# Altium PCB PCB1.PcbDoc
Units mm, origin at the board's own origin, x right, y up, seen from the top; angles counter-clockwise.
Board outline 100 x 100 mm, 2 copper layers (Top Layer, Bottom Layer); 113 components, 82 nets, 333 pads, 18 vias.
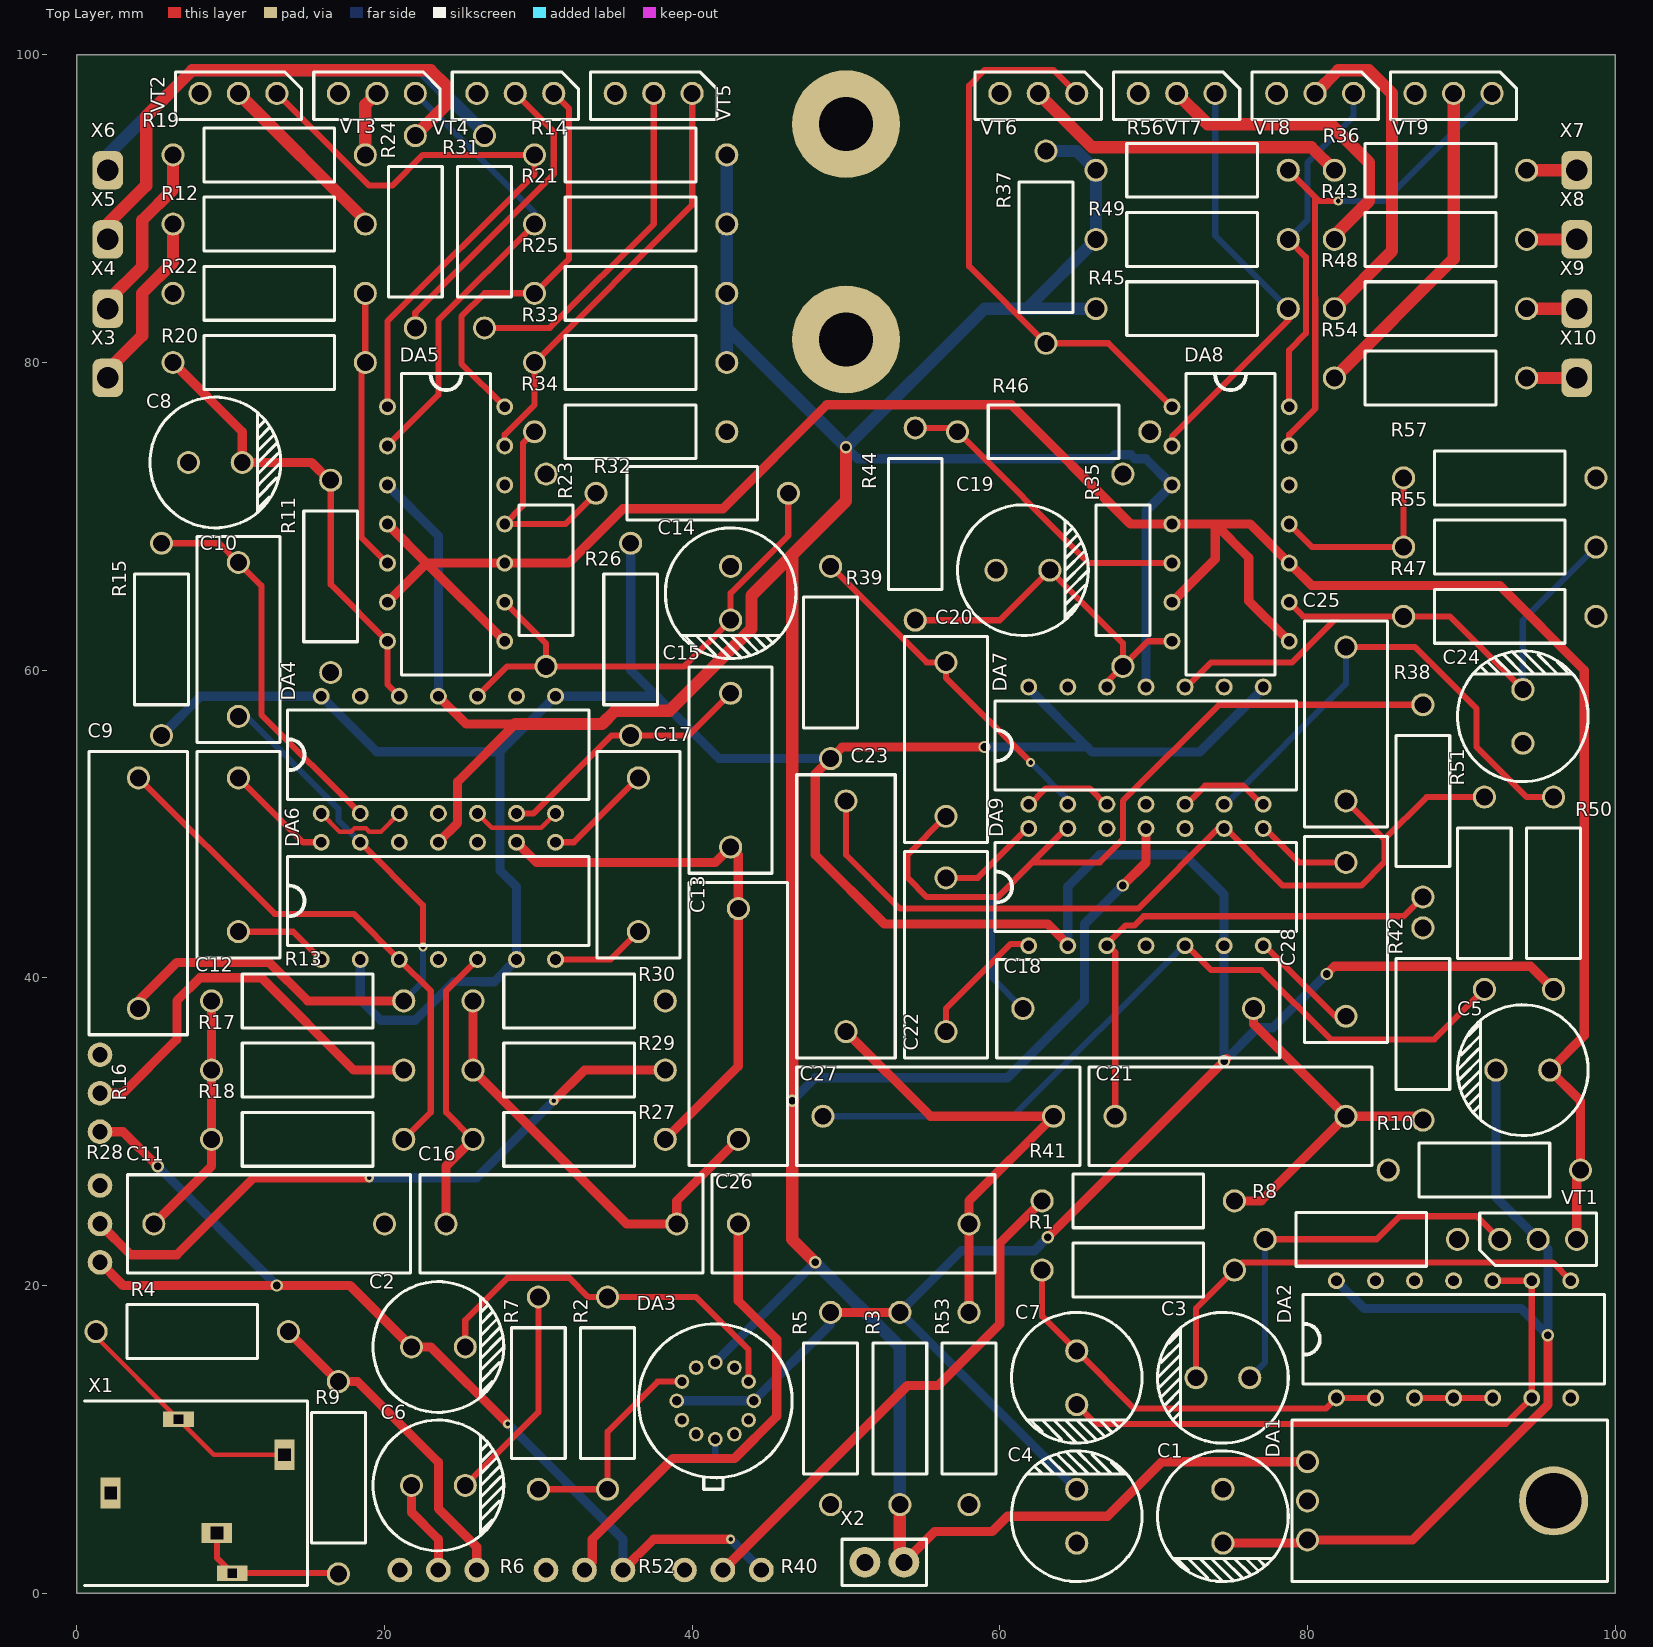
[diagram p0: Top Layer view]
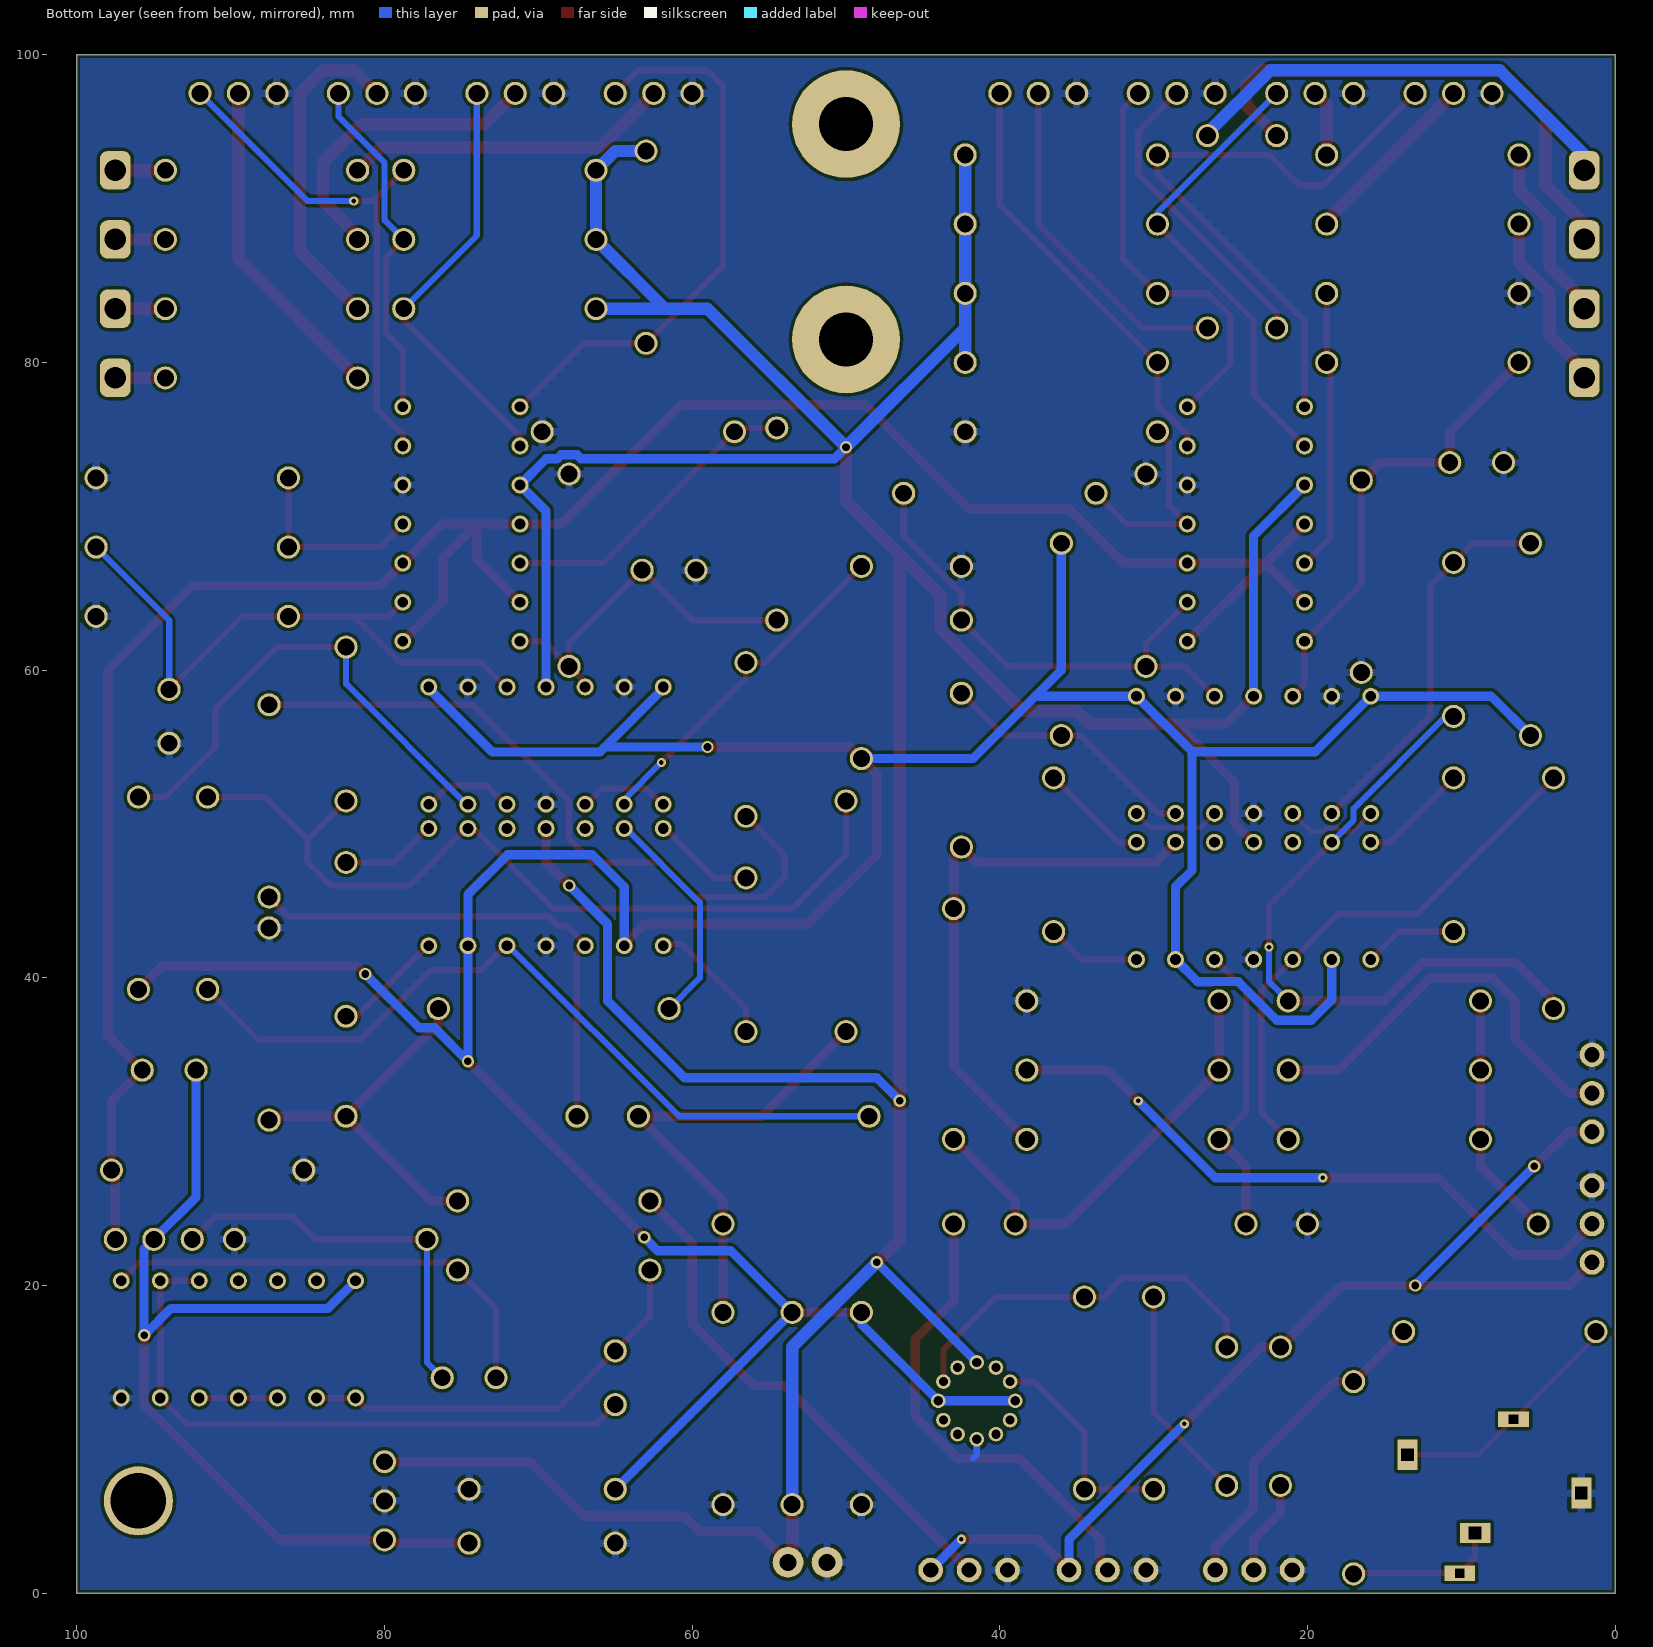
[diagram p1: Bottom Layer view, seen from below]

## Layer stack, top to bottom
Top Solder: solder mask 0.0102, Solder Resist, Dk 3.5
Top Layer: signal copper 0.0356
Dielectric 1: dielectric 0.32, FR-4, Dk 4.8
Bottom Layer: signal copper 0.0356
Bottom Solder: solder mask 0.0102, Solder Resist, Dk 3.5

## Board outline
0,0 100,0 100,100 0,100

## Design rules (kind name [scope] priority, off if disabled: settings)
BoardOutlineClearance [All] p1: gap=0.2 ignorepadtopadclearanceinfootprint=FALSE except(0.4: Arc-SplitBarrior Arc-SplitContinuation Track-SplitBarrior Track-SplitContinuation SMDPad-SplitBarrior SMDPad-SplitContinuation THPad-SplitBarrior THPad-SplitContinuation Via-SplitBarrior Via-SplitContinuation Fill-SplitBarrior Fill-SplitContinuation Poly-SplitBarrior Poly-SplitContinuation Region-SplitBarrior Region-SplitContinuation Text-SplitBarrior Text-SplitContinuation)
Clearance "Clearance Bottom Layer" [OnLayer('Bottom Layer')] p1: gap=0.203 ignorepadtopadclearanceinfootprint=TRUE except(0.254: Arc-Text Track-Text SMDPad-Text THPad-Text Via-Text Fill-Text Poly-Text Region-Text Text-Text)
Clearance "Clearance Top Layer" [OnLayer('Top Layer')] p2: gap=0.203 ignorepadtopadclearanceinfootprint=TRUE except(0.254: Arc-Text Track-Text SMDPad-Text THPad-Text Via-Text Fill-Text Poly-Text Region-Text Text-Text)
Clearance [All] p3: gap=0.2 ignorepadtopadclearanceinfootprint=FALSE except(0.089: Arc-Arc Arc-Track Arc-SMDPad Track-Track Track-SMDPad SMDPad-SMDPad; 0.127: Arc-Via Track-Via SMDPad-Via THPad-Via Via-Via; 0.254: Arc-Text Track-Text SMDPad-Text THPad-Text Via-Text Fill-Text Poly-Text Region-Text Text-Text)
HoleSize [All] p1: absolutevalues=TRUE maxlimit=6.3 minlimit=0.2 maxpercent=80.000 minpercent=20.000
MinimumAnnularRing [All] p1: minimumring=0.076
MinimumSolderMaskSliver [All] p1: minsoldermaskwidth=0.1
PolygonConnect PolygonConnect_1 [All] p1: thpad.connectstyle=Relief thpad.reliefconductorwidth=0.508 thpad.reliefentries=4 thpad.polygonreliefangle="90 Angle" thpad.airgapwidth=0.254 smdpad.connectstyle=Relief smdpad.reliefconductorwidth=0.508 smdpad.reliefentries=4 smdpad.polygonreliefangle="90 Angle" smdpad.airgapwidth=0.254 via.connectstyle=Direct via.reliefconductorwidth=0.508 via.reliefentries=4 via.polygonreliefangle="90 Angle" via.airgapwidth=0.254
RoutingCorners [All] p1: cornerstyle=Round minsetback=2.54 maxsetback=2.54
RoutingVias [All] p1: holewidth=0.5 width=1 viastyle="Through Hole" minholewidth=0.2 minwidth=0.45 maxholewidth=1 maxwidth=2
SilkToSilkClearance [All] p1: silktosilkclearance=0.1
SilkToSolderMaskClearance [IsPad] p1: minsilkscreentomaskgap=0.1 clearancetoexposedcopper=TRUE
SolderMaskExpansion [All] p1: expansion=0.102
Width [All] p1: maxlimit=2.54 minlimit=0.089 preferedwidth=0.381
25 further rules are at their usual default settings.

## Classes and differential pairs
component class Sheet1: C1 C2 C3 C4 C5 C6 C7 C8 C9 C10 C11 C12 C13 C14 C15 C16 C17 DA1 DA2 DA3 DA4 DA5 DA6 R1 R2 R3 R4 R5 R6 R7 R8 R9 R10 R11 R12 R13 R14 R15 R16 R17 R18 R19 R20 R21 R22 R23 R24 R25 R26 R27 R28 R29 R30 R31 R32 R33 R34 VT1 VT2 VT3 VT4 VT5 X1 X2 X3 X4 X5 X6
component class Sheet2: C18 C19 C20 C21 C22 C23 C24 C25 C26 C27 C28 DA7 DA8 DA9 R35 R36 R37 R38 R39 R40 R41 R42 R43 R44 R45 R46 R47 R48 R49 R50 R51 R52 R53 R54 R55 R56 R57 VT6 VT7 VT8 VT9 X7 X8 X9 X10

## Components (designator, comment, footprint, x,y, rotation, side; value= is the part's Value field where it differs from the comment)
C1 "100" "C 3.5mm" 74.5,5 r90 top
C2 "10" "C 3.5mm" 23.5,16 r180 top
C3 "0.47" "C 3.5mm" 74.5,14 r0 top
C4 "100" "C 3.5mm" 65,5 r270 top
C5 "4.7мкФ" "C 3.5mm" 94,34 r0 top
C6 "10" "C 3.5mm" 23.5,7 r180 top
C7 "10" "C 3.5mm" 65,14 r90 top
C8 "10" "C 3.5mm" 9,73.5 r180 top
C9 "*" "C 15mm" 4,45.5 r270 top
C10 "1мкФ" "C 10mm" 10.5,62 r90 top
C11 "*" "C 15mm" 12.5,24 r180 top
C12 "10пф" "C 10mm" 10.5,48 r90 top
C13 "*" "C 15mm" 43,37 r90 top
C14 "10" "C 3.5mm" 42.5,65 r90 top
C15 "1мкФ" "C 10mm" 42.5,53.5 r90 top
C16 "*" "C 15mm" 31.5,24 r180 top
C17 "10пф" "C 10mm" 36.5,48 r90 top
C18 "*" "C 15mm" 69,38 r180 top
C19 "10" "C 3.5mm" 61.5,66.5 r180 top
C20 "1мкФ" "C 10mm" 56.5,55.5 r90 top
C21 "*" "C 15mm" 75,31 r180 top
C22 "10пф" "C 10mm" 56.5,41.5 r90 top
C23 "*" "C 15mm" 50,44 r90 top
C24 "10" "C 3.5mm" 94,57 r270 top
C25 "1мкФ" "C 10mm" 82.5,56.5 r90 top
C26 "*" "C 15mm" 50.5,24 r0 top
C27 "*" "C 15mm" 56,31 r180 top
C28 "10пф" "C 10mm" 82.5,42.5 r90 top
DA1 "КРЕН 5А" TO-220 80,6 r270 top
DA2 "К155ЛА3" "14-LEAD DIP" 89.5,16.5 r0 top
DA3 "К140УД1" 301.12-1 41.5,12.5 r90 top
DA4 "К157ДА1" "14-LEAD DIP" 23.5,54.5 r0 top
DA5 "LM339N" "14-LEAD DIP" 24,69.5 r270 top
DA6 "К157УД2" "14-LEAD DIP" 23.5,45 r0 top
DA7 "К157ДА1" "14-LEAD DIP" 69.5,55.1 r0 top
DA8 "LM339N" "14-LEAD DIP" 75,69.5 r270 top
DA9 "К157УД2" "14-LEAD DIP" 69.5,45.9 r0 top
R1 "560 Ом" "R 10mm" 69,21 r0 top
R2 "27кОм" "R 10mm" 34.5,13 r90 top
R3 "10кОм" "R 10mm" 53.5,12 r270 top
R4 "1кОм" "R 10mm" 7.5,17 r0 top
R5 "10кОм" "R 10mm" 49,12 r90 top
R6 "*" "OFF BOARD RESISTOR" 23.5,1.5 r180 top
R7 "1кОм" "R 10mm" 30,13 r270 top
R8 "1кОм" "R 10mm" 83.5,23 r180 top
R9 "1кОм" "R 10mm" 17,7.5 r90 top
R10 "1.3кОм" "R 10mm" 91.5,27.5 r0 top
R11 "20кОм" "R 10mm" 16.5,66.1 r270 top
R12 "3.3 Ом" "R 10mm" 12.5,89 r180 top
R13 "*" "R 10mm" 15,38.5 r180 top
R14 "*" "R 10mm" 36,93.5 r0 top
R15 "22кОм" "R 10mm" 5.5,62 r270 top
R16 "*" "OFF BOARD RESISTOR" 1.5,32.5 r270 top
R17 "*" "R 10mm" 15,34 r180 top
R18 "*" "R 10mm" 15,29.5 r0 top
R19 "3.3 Ом" "R 10mm" 12.5,93.5 r180 top
R20 "47кОм" "R 10mm" 12.5,80 r0 top
R21 "*" "R 10mm" 36,89 r0 top
R22 "20кОм" "R 10mm" 12.5,84.5 r0 top
R23 "20кОм" "R 10mm" 30.5,66.5 r90 top
R24 "3.3 Ом" "R 10mm" 22,88.5 r90 top
R25 "*" "R 10mm" 36,84.5 r0 top
R26 "22кОм" "R 10mm" 36,62 r90 top
R27 "*" "R 10mm" 32,29.5 r180 top
R28 "*" "OFF BOARD RESISTOR" 1.5,24 r270 top
R29 "*" "R 10mm" 32,34 r180 top
R30 "*" "R 10mm" 32,38.5 r180 top
R31 "3.3 Ом" "R 10mm" 26.5,88.5 r90 top
R32 "47кОм" "R 10mm" 40,71.5 r180 top
R33 "*" "R 10mm" 36,80 r0 top
R34 "20кОм" "R 10mm" 36,75.5 r180 top
R35 "20кОм" "R 10mm" 68,66.5 r90 top
R36 "3.3 Ом" "R 10mm" 88,92.5 r0 top
R37 "*" "R 10mm" 63,87.5 r90 top
R38 "*" "R 10mm" 87.5,51.5 r270 top
R39 "22кОм" "R 10mm" 49,60.5 r270 top
R40 "*" "OFF BOARD RESISTOR" 42,1.5 r0 top
R41 "*" "R 10mm" 69,25.5 r0 top
R42 "*" "R 10mm" 87.5,37 r270 top
R43 "3.3 Ом" "R 10mm" 88,88 r0 top
R44 "47кОм" "R 10mm" 54.5,69.5 r90 top
R45 "*" "R 10mm" 72.5,83.5 r180 top
R46 "20кОм" "R 10mm" 63.5,75.5 r180 top
R47 "20кОм" "R 10mm" 92.5,63.5 r0 top
R48 "3.3 Ом" "R 10mm" 88,83.5 r0 top
R49 "*" "R 10mm" 72.5,88 r180 top
R50 "22кОм" "R 10mm" 96,45.5 r270 top
R51 "*" "R 10mm" 91.5,45.5 r270 top
R52 "*" "OFF BOARD RESISTOR" 33,1.5 r0 top
R53 "*" "R 10mm" 58,12 r90 top
R54 "3.3 Ом" "R 10mm" 88,79 r0 top
R55 "47кОм" "R 10mm" 92.5,68 r180 top
R56 "*" "R 10mm" 72.5,92.5 r180 top
R57 "20кОм" "R 10mm" 92.5,72.5 r180 top
VT1 "КТ315" KT-13 95,23 r0 top
VT2 "КТ815" KT-27 10.5,97.5 r180 top
VT3 "КТ815" KT-27 19.5,97.5 r180 top
VT4 "КТ815" KT-27 28.5,97.5 r180 top
VT5 "КТ815" KT-27 37.5,97.5 r180 top
VT6 "КТ815" KT-27 62.5,97.5 r180 top
VT7 "КТ815" KT-27 71.5,97.5 r180 top
VT8 "КТ815" KT-27 80.5,97.5 r180 top
VT9 "КТ815" KT-27 89.5,97.5 r180 top
X1 "ST-214N" ST-214N 0.5,6.5 r0 top
X2 "*" PLS-2 52.5,2 r180 top
X3 "" "TP 1,4mm" 2,79 r180 top
X4 "" "TP 1,4mm" 2,83.5 r180 top
X5 "" "TP 1,4mm" 2,88 r180 top
X6 "" "TP 1,4mm" 2,92.5 r180 top
X7 "" "TP 1,4mm" 97.5,92.5 r0 top
X8 "" "TP 1,4mm" 97.5,88 r0 top
X9 "" "TP 1,4mm" 97.5,83.5 r0 top
X10 "" "TP 1,4mm" 97.5,79 r0 top

## Footprints (in the part's own frame and the unit in brackets; to place one, negate y for a bottom-side part, rotate by r counter-clockwise, add the part's x,y. Pads: shape width x height; smd on the part's side, far side on the other; paste and mask are expansions set on the pad)
"14-LEAD DIP" [mm]
  round 1.1 hole 0.7: 1(-7.62,-3.81) 2(-5.08,-3.81) 3(-2.54,-3.81) 4(0,-3.81) 5(2.54,-3.81) 6(5.08,-3.81) 7(7.62,-3.81) 8(7.62,3.81) 9(5.08,3.81) 10(2.54,3.81) 11(0,3.81) 12(-2.54,3.81) 13(-5.08,3.81) 14(-7.62,3.81)
  silkscreen extent -9.8,-2.9 9.8,2.9, body extent -9.65,-3.81 9.65,3.81, height 4.15
301.12-1 [mm]
  round 0.95 hole 0.6: 1(-2.5,0) 2(-2.165,-1.25) 3(-1.25,-2.165) 4(0,-2.5) 5(1.25,-2.165) 6(2.165,-1.25) 7(2.5,0) 8(2.165,1.25) 9(1.25,2.165) 10(0,2.5) 11(-1.25,2.165) 12(-2.165,1.25)
  silkscreen extent -5.75,-5 5,5, body extent -5.75,-4.7 4.7,4.7, height 4.8
"C 3.5mm" [mm]
  round 1.5 hole 1.1: 1(-1.75,0) 2(1.75,0)
  silkscreen extent -4.25,-4.25 4.25,4.25, body extent -4.01,-4 4,4, height 12.51
"C 10mm" [mm]
  round 1.5 hole 1.1: 1(-5,0) 2(5,0)
  silkscreen extent -6.7,-2.7 6.7,2.7, body extent -6.5,-2.5 6.5,2.5, height 11.01
"C 15mm" [mm]
  round 1.5 hole 1.1: 1(-7.5,0) 2(7.5,0)
  silkscreen extent -9.2,-3.2 9.2,3.2, body extent -9,-3 9,3, height 12
KT-13 [mm]
  round 1.5 hole 1.1: 1(-2.5,0) 2(2.5,0) 3(0,0)
  silkscreen extent -3.8,-1.7 3.8,1.7, body extent -3.6,-1.5 3.6,1.5, height 5
KT-27 [mm]
  round 1.5 hole 1.1: 1(-2.5,0) 2(2.5,0) 3(0,0)
  silkscreen extent -4.1,-1.4 4.1,1.7, body extent -3.9,-1.25 3.9,1.55, height 11.25
"OFF BOARD RESISTOR" [mm]
  round 1.6 hole 1: 1(2.5,0) 2(-2.5,0) 3(0,0)
PLS-2 [mm]
  round 2 hole 1.1: 1(-1.27,0) 2(1.27,0)
  silkscreen extent -2.73,-1.5 2.77,1.5, body extent -2.54,-1.27 2.54,1.27, height 8.44
"R 10mm" [mm]
  round 1.5 hole 1.1: 1(-6.25,0) 2(6.25,0)
  silkscreen extent -4.25,-1.75 4.25,1.75, body extent -6.72,-1.87 6.73,1.88, height 4.08
ST-214N [mm]
  rect 1.3x2 hole 0.8 square: 1(1.7,0) 4(13,2.5)
  rect 2x1 hole 0.6 square: 2(6.1,4.8) 3(9.6,-5.2)
  rect 2x1.3 hole 0.8 square: 5(8.6,-2.6)
  silkscreen extent 0,-6 14.5,6, body extent -3.5,-5.75 14.25,5.75, height 6.6
TO-220 [mm]
  round 1.5 hole 1.1: 1(-2.54,0) 2(0,0) 3(2.54,0)
  round 4.5 hole 3.6: MP(0,16)
  silkscreen extent -5.25,-1 5.25,19.5, body extent -5.08,-0.25 5.08,19.24, height 4.2
"TP 1,4mm" [mm]
  rrect50% 2x2.5 hole 1.4: 1(0,0)

## Part data
C1 C2 C3 C4 C5 C6 C7 C8 C14 C19 C24: library part "Capacitor Pol"
C9 C10 C11 C12 C13 C15 C16 C17 C18 C20 C21 C22 C23 C25 C26 C27 C28: library part Capacitor
DA1: library part "KREN 5A"
R1 R2 R3 R4 R5 R7 R8 R9 R10 R11 R12 R13 R14 R15 R17 R18 R19 R20 R21 R22 R23 R24 R25 R26 R27 R29 R30 R31 R32 R33 R34 R35 R36 R37 R38 R39 R41 R42 R43 R44 R45 R46 R47 R48 R49 R50 R51 R53 R54 R55 R56 R57: library part Resistor
R6 R16 R28 R40 R52: library part ResistorVar
VT1 VT2 VT3 VT4 VT5 VT6 VT7 VT8 VT9: library part NPN, "Transistor"
X1: "Connector"
X2: library part "Connector 2-pin", "Connector"
X3 X4 X5 X6 X7 X8 X9 X10: library part TP

## Free pads (board coordinates)
  round 7 hole 3.5: MP(50,81.5) MP(50,95.5)

## Via types
v1: diameter 0.8, hole 0.5, Top Layer to Bottom Layer, 11 vias
v2: diameter 0.6, hole 0.3, Top Layer to Bottom Layer, 7 vias

## Nets (pads, with @x,y where several pads share a name; then routed paths per layer and width w, separated by ;. In a path a pad name is that pad's centre, name@x,y a point inside that pad or via, vN(x,y) a via of type N, cw(c..) or ccw(c..) an arc to the next point about the centre after c; other vN are vias at no path point)
+5V: C1.1 C5.1 DA1.3 DA2.14 VT1.3 | length 63.2
  Top Layer w0.6: C1.1 79.79,3.25 DA1.3 86.835,3.46 95.012,11.637 95.016,11.637 95.633,12.254 95.633,13.126 95.63,13.129 v1(95.63,16.76)
  Bottom Layer w0.6: DA2.14 83.69,18.5 93.89,18.5 v1(95.63,16.76) 95.63,19.871 95.633,19.874 95.633,20.746 95.63,20.749 95.63,22.37 VT1.3 92.25,25.75 C5.1
+6V: C4.1 DA3.4 DA3.10 DA4.8 DA4.14 DA6.2 DA6.6 DA7.8 DA7.14 DA9.2 DA9.6 R3.1 R5.2 R15.2 R26.2 R39.2 R50.2 | length 263.3
  Top Layer w0.6: R5.2 R3.1 ; v1(59,55) 49.75,55 R39.2 48,53.25 48,48 52.5,43.5 63.11,43.5 DA9.2@64.42,42.19 ; v1(63.125,23.125) 74.75,34.75 v1(74.58,34.58) ; v1(81.25,40.25) 81.75,40.75 94.5,40.75 R50.2
  Bottom Layer w0.6: R15.2 8.06,58.31 DA4.14 19.5,54.69 27.5,54.69 ; DA6.2 18.42,38.58 19.753,37.247 21.997,37.247 24.503,39.753 26.269,39.753 26.272,39.75 27.14,39.75 DA6.6 28.58,45.92 27.5,47 27.5,54.69 ; R26.2 36,60 37.69,58.31 ; DA3.10 DA3.4 49,17.5 R5.2 ; R39.2 41.75,54.25 37.69,58.31 ; v1(59,55) 65.69,55 ; DA7.14@61.88,58.81 65.69,55 ; v1@63.25,23.25 v1(63.125,23.125) 62.25,22.25 57.5,22.25 R3.1 C4.1 ; DA9.2@64.42,42.19 64.42,45.92 66.5,48 72,48 74.58,45.42 74.58,42.19 v1(74.58,34.58) 76.75,36.75 77.75,36.75 v1(81.25,40.25) ; DA7.8@77.12,58.81 72.984,54.674 66.016,54.674 65.69,55 ; 27.5,54.69 DA4.8 37.69,58.31
+12V: DA1.1 DA3.7 DA4.11 DA5.3 DA6.11 DA7.11 DA8.3 DA9.11 R3.2 R14.2 R21.2 R25.2 R33.2 R37.2 R45.2 R49.2 R56.2 X2.1 | length 299.6
  Top Layer w0.6: DA6.11 24.75,50.06 24.75,52.75 28.5,56.5 25.31,56.5 DA4.11 ; X2.1 55.77,4 59.5,4 60.5,5 67,5 70.54,8.54 DA1.1 ; v1(68,46) 69.5,47.5 DA9.11@69.5,49.81
  Top Layer w0.8: 28.5,56.5 34.134,56.5 35,57.366 38.529,57.366 43.853,62.689 43.853,63.853 43.853,64.853 50,71 v1(50,74.5) ; 46.5,67.5 v1(46.5,32) 46.5,23 v1(48,21.5) ; R3.2 53.5,2.27 X2.1
  Bottom Layer w0.6: DA5.3 23.5,68.73 DA4.11 ; DA3.7 v1(48,21.5) ; v1(46.5,32) 48,33.5 60.5,33.5 65.5,38.5 65.5,43.5 v1(68,46) ; v1(50,74.5) 50.75,73.75 67.228,73.75 67.481,74.003 68.519,74.003 68.772,73.75 69.48,73.75 DA8.3 69.5,70.35 DA7.11@69.5,58.81
  Bottom Layer w0.8: R33.2 42.25,82.25 ; R14.2 R21.2 R25.2 42.25,82.25 ; v1(48,21.5) 53.5,16 R3.2 ; R37.2 65,93.75 R56.2 R49.2 61.75,83.5 ; R45.2 61.75,83.5 ; 42.25,82.25 v1(50,74.5) 59,83.5 61.75,83.5
GND: C1.2 C4.2 C8.2 C11.1 C14.2 C19.2 C24.2 DA1.2 DA2.7 DA3.1 DA4.4 DA4.9 DA4.13 DA5.12 DA6.4 DA7.4 DA7.9 DA7.13 DA8.12 DA9.4 R5.1 R6.1 R8.1 R10.1 R11.2 R16.2 R22.1 R23.2 R28.2 R30.1 R34.1 R35.2 R40.2 R42.1 R46.1 R47.2 R52.2 R53.1 R57.1 VT2.2 VT3.2 VT4.2 VT5.2 VT6.2 VT7.2 VT8.2 VT9.2 X1.1 X2.2 | length 1.4
  Bottom Layer w0.4: DA3.1 41.5,9 41.75,8.75
LARGE_IN: C2.2 R16.1 R28.1 R40.1 R52.1 | length 69.8
  Top Layer w0.6: R28.1 3,20 v1(13,20) 17.75,20 C2.2 23,16 v2(28,11) ; R16.1 3,30 v1(5.25,27.75) ; R52.1 37.5,3.5 v2(42.5,3.5)
  Bottom Layer w0.6: v1(5.25,27.75) v1(13,20) ; v2(28,11) 35.5,3.5 R52.1 ; v2(42.5,3.5) R40.1
NetC2_1: C2.1 DA3.5 R2.2 | length 25.3
  Top Layer w0.4: C2.1 25.25,17.75 28,20.5 32,20.5 33.25,19.25 R2.2 40.25,19.25 43.665,15.835 DA3.5
NetC3_1: C3.1 DA2.8 R1.2 | length 30.6
  Top Layer w0.4: C3.1 72.75,18.5 R1.2 75.75,21.5 95.93,21.5 DA2.8
NetC3_2: C3.2 R8.2 VT1.1 | length 25.9
  Top Layer w0.4: R8.2 84.5,23 86,24.5 91,24.5 VT1.1
  Bottom Layer w0.4: C3.2 77.25,15 R8.2
NetC6_1: C6.1 R7.1 | length 14.2
  Top Layer w0.4: C6.1 30,11.75 R7.1
NetC6_2: C6.2 R6.3 | length 6.2
  Top Layer w0.6: C6.2 21.75,5.25 23.5,3.5 R6.3
NetC7_1: C7.1 DA2.6 DA2.9 DA2.10 | length 41
  Top Layer w0.4: C7.1 66.25,11 92.89,11 DA2.6 DA2.9 DA2.10
NetC7_2: C7.2 DA2.1 DA2.2 R1.1 | length 27.4
  Top Layer w0.4: R1.1 62.75,18 C7.2 68.75,12 81.19,12 DA2.1 DA2.2
NetC8_1: C8.1 DA4.12 DA5.7 R11.1 R20.1 | length 30.4
  Top Layer w0.4: R11.1@16.5,72.25 16.5,65.57 DA5.7 20.19,59.08 DA4.12
  Top Layer w0.6: R20.1 10.75,75.5 C8.1 15.25,73.5 R11.1@16.5,72.25
NetC9_1: C9.1 DA6.3 R18.2 | length 35.1
  Top Layer w0.4: C9.1 12.85,44.15 18,44.15 DA6.3 23,39.15 23,31.25 R18.2
NetC9_2: C9.2 C10.1 DA6.13 R13.1 | length 44.1
  Top Layer w0.4: DA6.13 22.5,44.73 v2(22.5,42)
  Top Layer w0.6: C9.2 4,38.5 6.5,41 12.5,41 15,38.5 R13.1
  Bottom Layer w0.4: C10.1 11,57 17,51 17,50.23 DA6.13 ; R13.1 22.5,39.75 v2(22.5,42)
NetC10_2: C10.2 DA4.2 R15.1 | length 25.1
  Top Layer w0.4: R15.1 9.25,68.25 C10.2 12,65.5 12,57.11 DA4.2
NetC11_2: C11.2 R13.2 R17.2 R18.1 | length 16.1
  Top Layer w0.6: C11.2 8.75,27.75 R18.1 R17.2 R13.2
NetC12_1: C12.1 DA6.1 | length 6.1
  Top Layer w0.4: C12.1 14.07,43 DA6.1
NetC12_2: C12.2 DA6.14 | length 7.1
  Top Layer w0.4: C12.2 14.69,48.81 DA6.14
NetC13_1: C13.1 C16.1 R29.2 R30.2 | length 29
  Top Layer w0.6: R30.2 R29.2 35.75,24 C16.1 39,25.5 C13.1
NetC13_2: C13.2 C15.1 DA6.9 R27.1 | length 36.1
  Top Layer w0.6: DA6.9 29.89,47.5 41.5,47.5 C15.1 43,48 C13.2 43,34.25 R27.1
NetC14_1: C14.1 DA4.10 DA5.9 R23.1 R32.1 | length 33.6
  Top Layer w0.4: DA4.10 27.98,60.25 R23.1 ; DA5.9 30.5,61.73 R23.1 ; R32.1 46.25,68.75 42.5,65 C14.1 39.5,60.25 R23.1
NetC15_2: C15.2 DA4.6 R26.1 | length 17.2
  Top Layer w0.4: DA4.6 29.69,50.69 34.75,55.75 R26.1 39.75,55.75 C15.2
NetC16_2: C16.2 DA6.5 R27.2 | length 19.5
  Top Layer w0.4: R27.2 24,31.25 24,39.15 DA6.5
  Top Layer w0.6: C16.2 24,27.75 R27.2
NetC17_1: C17.1 DA6.7 | length 6.1
  Top Layer w0.4: DA6.7 34.69,41.19 C17.1
NetC17_2: C17.2 DA6.8 | length 7.1
  Top Layer w0.4: DA6.8 32.31,48.81 C17.2
NetC18_1: C18.1 C21.1 R41.2 R42.2 | length 24.1
  Top Layer w0.6: R41.2 77,25.5 C21.1 ; C18.1 76.5,37 C21.1 ; R42.2 87.25,31 C21.1
NetC18_2: C18.2 C20.1 DA9.13 R38.1 | length 63.6
  Top Layer w0.4: C20.1 54,48 54,46.5 55.25,45.25 59.86,45.25 62.11,47.5 ; DA9.13@64.42,49.81 62.11,47.5 ; R38.1 74.25,57.75 68,51.5 68,49 66.5,47.5 62.11,47.5
  Bottom Layer w0.4: C18.2 59.5,40 59.5,44.89 DA9.13@64.42,49.81
NetC19_1: C19.1 DA7.12 DA8.7 R35.1 R44.1 | length 24
  Top Layer w0.4: R44.1 60,63.25 C19.1 68,61.75 R35.1 ; DA7.12@66.96,58.81 66.96,59.21 R35.1 ; DA8.7 69.63,61.88 R35.1
NetC20_2: C20.2 DA7.2 R39.1 | length 22.7
  Top Layer w0.4: R39.1 55.25,60.5 C20.2 56.5,59.5 v2(62,54)
  Bottom Layer w0.4: v2(62,54) 64.42,51.58 DA7.2@64.42,51.19
NetC21_2: C21.2 DA9.3 R38.2 | length 33.2
  Top Layer w0.4: C21.2 67.5,41.65 66.96,42.19 68.17,43.4 68.749,43.4 69.349,44 86.25,44 R38.2
NetC22_1: C22.1 DA9.1 | length 8.6
  Top Layer w0.4: C22.1 56.5,38 60.69,42.19 DA9.1@61.88,42.19
NetC22_2: C22.2 DA9.14 | length 6.8
  Top Layer w0.4: C22.2 58.57,46.5 DA9.14@61.88,49.81
NetC23_1: C23.1 C26.2 C27.1 R53.2 | length 30.8
  Top Layer w0.6: C23.1 55.5,31 C27.1 58,25.5 C26.2 R53.2
NetC23_2: C23.2 C25.1 DA9.9 R51.1 | length 57
  Top Layer w0.4: C23.2 50,48 53.5,44.5 69,44.5 74.31,49.81 74.58,49.81 78.39,46 83.5,46 85,47.5 85,49 ; C25.1 85,49 ; R51.1 87.75,51.75 85,49
NetC24_1: C24.1 DA7.10 DA8.9 R47.1 R55.1 | length 40.7
  Top Layer w0.4: DA7.10@72.04,58.81 73.73,60.5 79,60.5 82,63.5 ; DA8.9 79.73,63.5 82,63.5 ; C24.1 89.25,63.5 R47.1 82,63.5
  Bottom Layer w0.4: C24.1 94,63.25 R55.1
NetC25_2: C25.2 DA7.6 R50.1 | length 32.6
  Top Layer w0.4: C25.2 87,61.5 91,57.5 91,55 94.25,51.75 R50.1
  Bottom Layer w0.4: DA7.6@74.58,51.19 82.5,59.11 C25.2
NetC26_1: C26.1 R52.3 | length 31.1
  Top Layer w0.6: R52.3 33.5,2 33.5,3.5 38.75,8.75 42.75,8.75 45.5,11.5 45.5,16.5 43,19 C26.1
NetC27_2: C27.2 DA9.5 R51.2 | length 51.5
  Top Layer w0.4: DA9.5@72.04,42.19 73.73,40.5 77,40.5 81.5,36 88.25,36 R51.2
  Bottom Layer w0.4: C27.2 60.85,31 DA9.5@72.04,42.19
NetC28_1: C28.1 DA9.7 | length 7.3
  Top Layer w0.4: DA9.7@77.12,42.19 81.81,37.5 C28.1
NetC28_2: C28.2 DA9.8 | length 6.3
  Top Layer w0.4: DA9.8@77.12,49.81 79.43,47.5 C28.2
NetDA2_3: DA2.3 DA2.4 DA2.5 | length 5.1
  Top Layer w0.4: DA2.3 DA2.4 DA2.5
NetDA3_9: DA3.9 R2.1 R7.2 | length 14.4
  Top Layer w0.4: R7.2 R2.1 34.5,10.5 37.75,13.75 DA3.9
NetDA4_1: DA4.1 DA4.3 | length 6.2
  Top Layer w0.3: DA4.1 17.07,49.5 17.833,49.5 18.046,49.713 18.794,49.713 19.007,49.5 19.77,49.5 DA4.3
NetDA4_5: DA4.5 DA4.7 | length 5.9
  Top Layer w0.3: DA4.5 26.98,49.75 30.18,49.75 DA4.7
NetDA5_1: DA5.1 R14.1 VT2.1 | length 40.4
  Top Layer w0.4: VT2.1 19,91.5 20.5,91.5 22.5,93.5 R14.1 29.75,92.25 20.19,82.69 DA5.1
NetDA5_2: DA5.2 R21.1 VT3.1 | length 30.1
  Top Layer w0.4: DA5.2 23.5,77.89 23.5,82.75 R21.1
  Bottom Layer w0.4: VT3.1 29.75,89.75 R21.1
NetDA5_5: DA5.5 R20.2 R22.2 | length 18.3
  Top Layer w0.4: R22.2 R20.2 18.5,79.75 18.5,68.65 DA5.5
NetDA5_11: DA5.11 R32.2 R34.2 | length 13.6
  Top Layer w0.4: R34.2 29,74.75 29,70.69 DA5.11 31.75,69.5 R32.2
NetDA5_13: DA5.13 R33.1 VT5.1 | length 28
  Top Layer w0.4: DA5.13 27.81,75.31 29.75,77.25 R33.1 40,90.25 VT5.1
NetDA5_14: DA5.14 R25.1 VT4.1 | length 26.8
  Top Layer w0.4: DA5.14 25,79.93 25,83 26.5,84.5 R25.1 32,86.75 32,96.5 VT4.1
NetDA7_1: DA7.1 DA7.3 | length 6
  Top Layer w0.4: DA7.1@61.88,51.19 63,52.31 65.84,52.31 DA7.3@66.96,51.19
NetDA7_5: DA7.5 DA7.7 | length 6.2
  Top Layer w0.4: DA7.5@72.04,51.19 73.35,52.5 75.81,52.5 DA7.7@77.12,51.19
NetDA8_1: DA8.1 R37.1 VT6.1 | length 36.8
  Top Layer w0.4: VT6.1 63.5,99 59,99 58,98 58,86.25 R37.1 67.06,81.25 DA8.1
NetDA8_2: DA8.2 R45.1 VT7.1 | length 28
  Top Layer w0.4: DA8.2 71.19,75.19 78.75,82.75 R45.1
  Bottom Layer w0.4: VT7.1 74,88.25 R45.1
NetDA8_5: DA8.5 R44.2 R46.2 | length 20.3
  Top Layer w0.4: R44.2 57,75.75 R46.2 65.79,66.96 DA8.5
NetDA8_11: DA8.11 R55.2 R57.2 | length 12.6
  Top Layer w0.4: DA8.11 80.31,68 R55.2 R57.2
NetDA8_13: DA8.13 R56.1 VT9.1 | length 33.9
  Top Layer w0.4: R56.1 80.75,90.5 v2(82,90.5) ; DA8.13 78.81,75.31 80.506,77.006 80.506,84.228 80.5,84.234 80.5,90.75
  Bottom Layer w0.4: v2(82,90.5) 85,90.5 VT9.1
NetDA8_14: DA8.14 R49.1 VT8.1 | length 23.1
  Top Layer w0.4: R49.1 79.897,86.853 79.897,83.984 79.903,83.978 79.903,81.903 78.81,80.81 DA8.14
  Bottom Layer w0.4: R49.1 80,89.25 80,93 83,96 VT8.1
NetR4_1: R4.1 X1.2 X1.4 | length 15.8
  Top Layer w0.3: R4.1 1.25,16.65 X1.2 8.9,9 X1.4
NetR4_2: R4.2 R6.2 R9.2 | length 21.3
  Top Layer w0.6: R4.2 R9.2 18.25,13.75 23.5,8.5 23.5,5.5 26,3 R6.2
NetR9_1: R9.1 X1.3 X1.5 | length 9.9
  Top Layer w0.4: X1.5 9.1,2.3 X1.3 16.95,1.3 R9.1
NetR12_1: R12.1 VT2.3 | length 11.9
  Top Layer w0.8: VT2.3 18.75,89.25 R12.1
NetR12_2: R12.2 X3.1 | length 11.8
  Top Layer w0.8: X3.1 2,79.5 4.25,81.75 4.25,84.509 6.25,86.509 R12.2
NetR16_3: R16.3 R17.1 | length 26.8
  Top Layer w0.6: R16.3 3,32.5 6.5,36 6.5,38.5 8,40 12,40 18,34 R17.1
NetR19_1: R19.1 VT3.3 | length 4.3
  Top Layer w0.8: R19.1 18.75,96.75 VT3.3
NetR19_2: R19.2 X4.1 | length 11.8
  Top Layer w0.8: X4.1 2,84 4.25,86.25 4.25,89.25 6.25,91.25 R19.2
NetR24_1: R24.1 VT4.3 | length 20
  Top Layer w0.4: R24.1 22,83.25 31,92.25 31,95 VT4.3
NetR24_2: R24.2 X5.1 | length 34.3
  Top Layer w0.8: X5.1 2,89 4.5,91.5 4.5,96 7.5,99 23,99 24,98 24,96.75 R24.2
NetR28_3: R28.3 R29.1 | length 42.5
  Top Layer w0.6: R28.3 3.5,22 6.5,22 11.5,27 v2(19,27) ; v2(31,32) 33,34 R29.1
  Bottom Layer w0.6: v2(19,27) 26,27 v2(31,32)
NetR31_1: R31.1 VT5.3 | length 22.3
  Top Layer w0.4: R31.1 30.75,82.25 37.5,89 VT5.3
NetR31_2: R31.2 X6.1 | length 29.6
  Bottom Layer w0.8: X6.1 2,93.5 7.5,99 22.414,99 26.5,94.914 R31.2
NetR36_1: R36.1 VT6.3 | length 21.3
  Top Layer w0.8: VT6.3 66,94 80.25,94 R36.1
NetR36_2: R36.2 X7.1 | length 3.3
  Top Layer w0.8: R36.2 X7.1
NetR40_3: R40.3 R41.1 | length 33.8
  Top Layer w0.6: R40.3 54,13.5 56,13.5 60,17.5 60,22.75 R41.1
NetR43_1: R43.1 VT7.3 | length 20.3
  Top Layer w0.8: VT7.3 73.5,95.5 81.5,95.5 84,93 84,90.5 81.75,88.25 R43.1
NetR43_2: R43.2 X8.1 | length 3.3
  Top Layer w0.8: R43.2 X8.1
NetR48_1: R48.1 VT8.3 | length 21.8
  Top Layer w0.8: VT8.3 82,99 84,99 85.5,97.5 85.5,87.25 R48.1
NetR48_2: R48.2 X9.1 | length 3.3
  Top Layer w0.8: R48.2 X9.1
NetR54_1: R54.1 VT9.3 | length 21.7
  Top Layer w0.8: R54.1 89.5,86.75 VT9.3
NetR54_2: R54.2 X10.1 | length 3.3
  Top Layer w0.8: R54.2 X10.1
SAW: C5.2 DA5.4 DA5.6 DA5.8 DA5.10 DA8.4 DA8.6 DA8.8 DA8.10 R10.2 VT1.2 | length 155.8
  Top Layer w0.6: DA5.6 22.73,66.96 ; DA5.4 22.73,66.96 ; DA5.8 22.73,66.96 ; DA8.6 74,67.23 74,69.5 ; DA8.8 76.19,64.5 76.19,67.31 74,69.5 ; VT1.2 97.5,27.25 R10.2 97.75,32 C5.2 98,36.25 98,60 92.5,65.5 80.27,65.5 DA8.10 76.27,69.5 74,69.5 ; 22.73,66.96 DA5.10 31.96,66.96 35.5,70.5 42,70.5 48.75,77.25 60.75,77.25 68.5,69.5 DA8.4 74,69.5
pads on no net: DA1.MP DA2.11 DA2.12 DA2.13 DA3.2 DA3.3 DA3.6 DA3.8 DA3.11 DA3.12 DA6.10 DA6.12 DA9.10 DA9.12

## Polygon pours and split planes (outlines as drawn)
GND on Bottom Layer "Bottom Layer-No Net" (solid, remove dead copper, pour order 2): 0,0 100,0 100,100 0,100

## Silkscreen, mask and mechanical layers (free items; w line width, h text height)
Mechanical 6:
  the board outline again, w0.2

## Dimensions
0,0 to 0,100 on Mechanical 6
0,100 to 100,100 on Mechanical 6